# EAGLE board saklar sentuh biru (EAGLE 9.6.2)
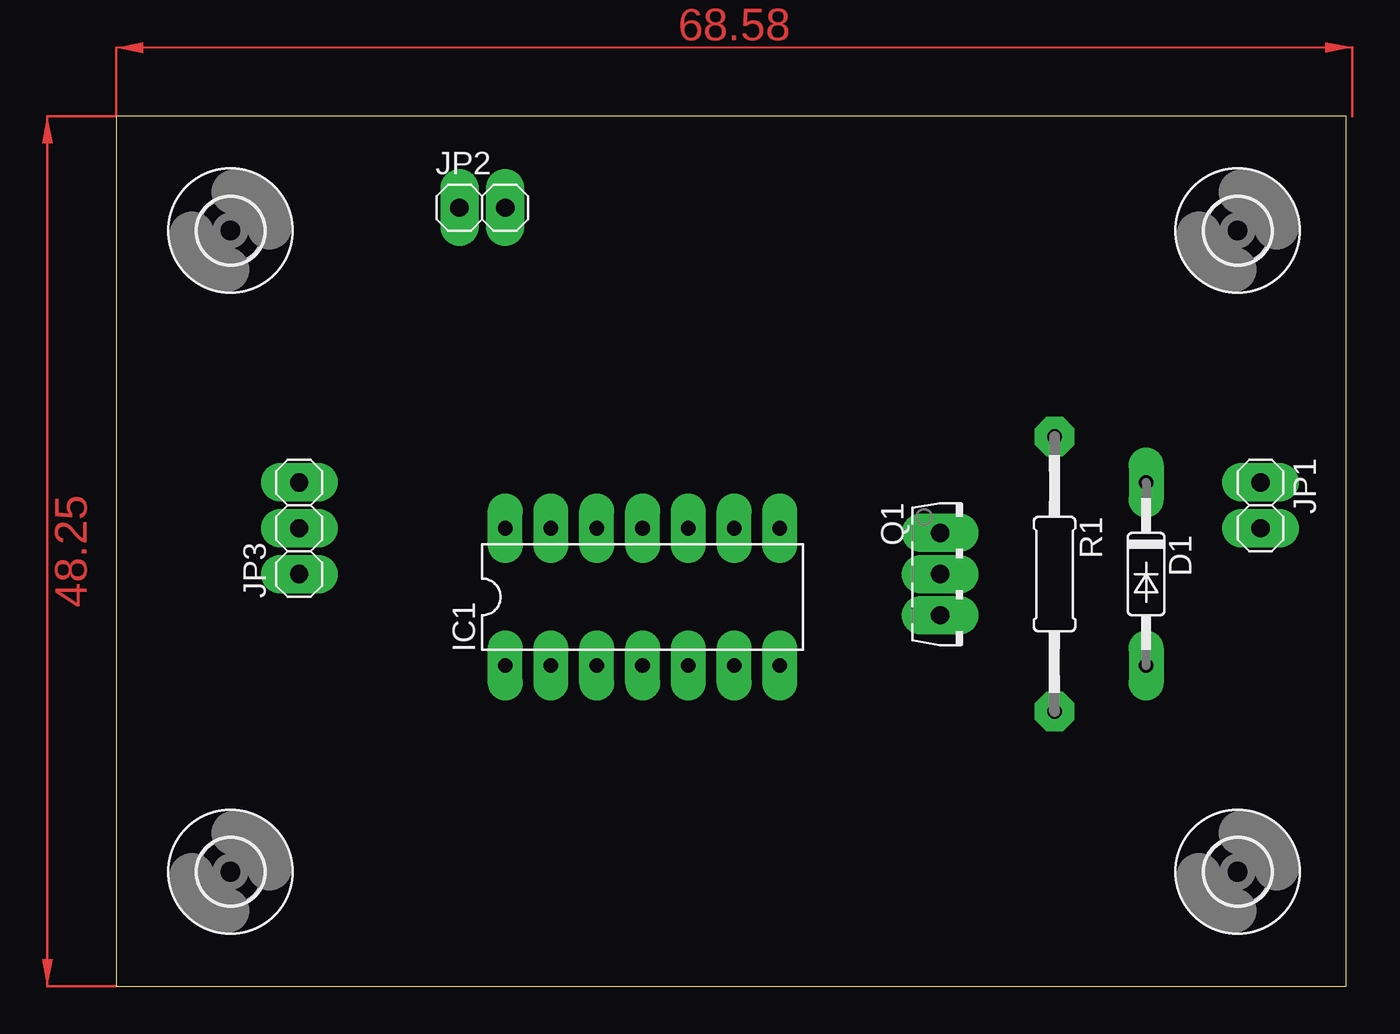
[diagram p0: board, top side]
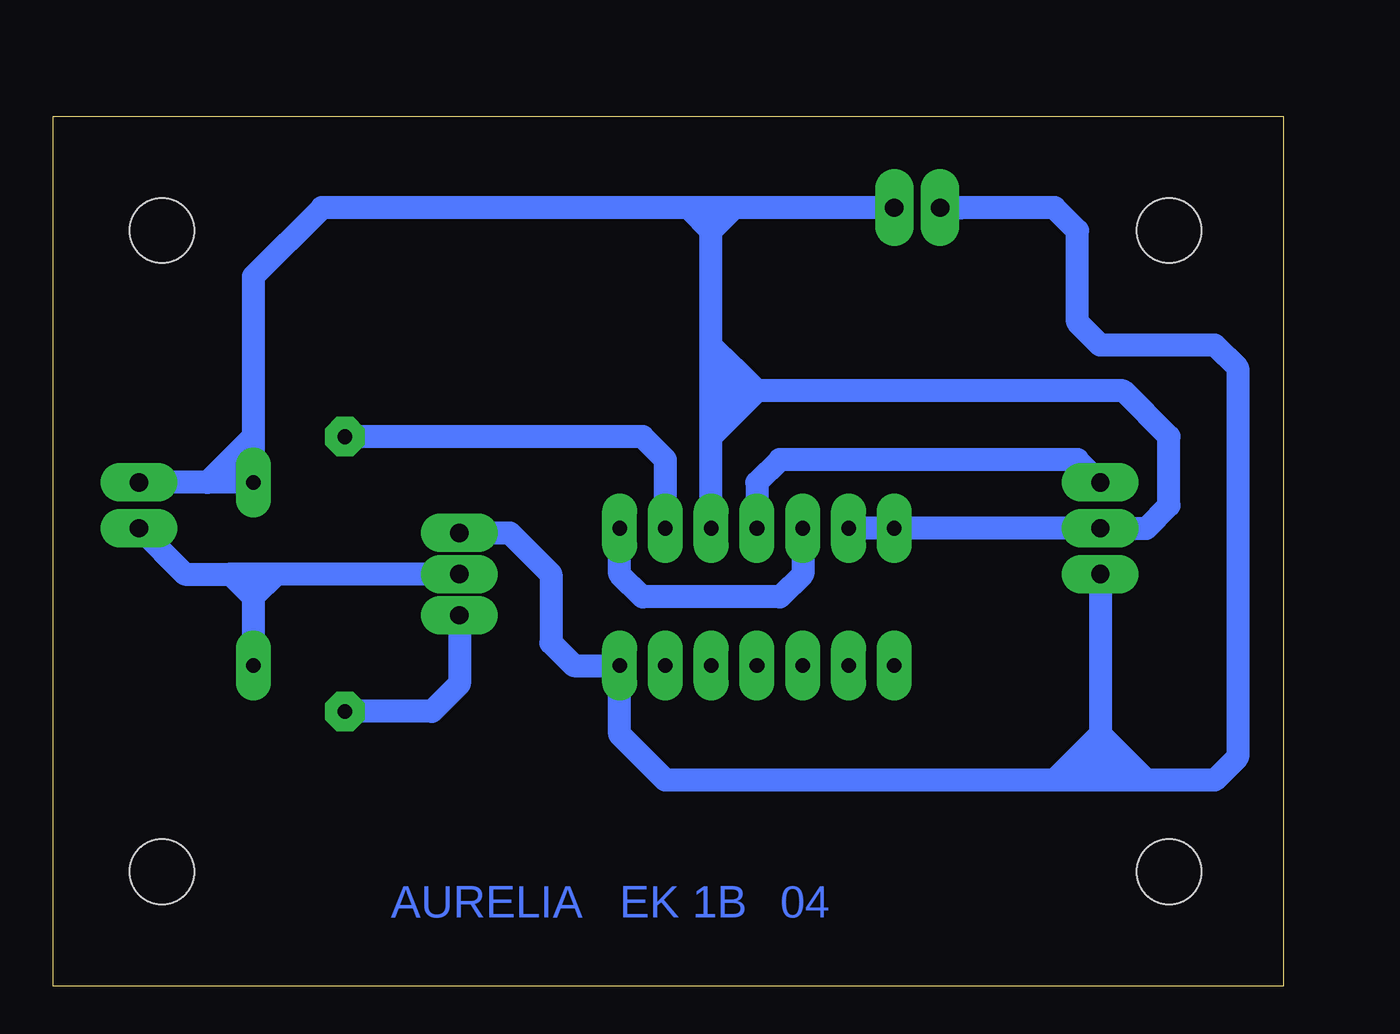
[diagram p1: board, bottom side, seen from below]

Size 68.25 x 48.25 mm. Coordinates in mm from the lower left corner, seen from the top.
Outline: 0,0 68.25,0 68.25,48.25 0,48.25 0,0
Copper layers (1*16): Top 0.035mm / dielectric 1.5mm / Bottom 0.035mm
Design rules "default *": minimum track width 6mil, minimum drill 0.35mm, track to track 6mil, track to pad 6mil, pad to pad 6mil, via to via 6mil, smd to smd 6mil, copper to edge 40mil, drill to drill 6mil, minimum pad ring 22mil, minimum via ring 8mil, stop-mask expansion 4mil, vias tented up to drill 0mil, thermal gap 10mil

## Footprints (pad centres in the part's own frame; a part is rotated, then mirrored left to right if it is on the bottom)
DO35-10 = drill 0.813 long: A 5.08,0; C -5.08,0
3,6 = hole 3.6: 0,0
DIL14 = drill 0.813 pad 1.778 long: 1 -7.62,-3.81; 2 -5.08,-3.81; 3 -2.54,-3.81; 4 0,-3.81; 5 2.54,-3.81; 6 5.08,-3.81; 7 7.62,-3.81; 8 7.62,3.81; 9 5.08,3.81; 10 2.54,3.81; 11 0,3.81; 12 -2.54,3.81; 13 -5.08,3.81; 14 -7.62,3.81
1X02 = drill 1.016 pad 1.93 long: 1 -1.27,0; 2 1.27,0
1X03 = drill 1.016 pad 1.93 long: 1 -2.54,0; 2 0,0; 3 2.54,0
TO126AV = drill 1.016 long: B 2.286,-1.27; C 0,-1.27; E -2.286,-1.27
0207/15 = drill 0.813 pad 2.184 octagon: 1 -7.62,0; 2 7.62,0

## Placement (x,y rotation side)
D1  1N4148DO35-10  [DO35-10]  57.15,22.86 270 top
H1  MOUNT-HOLE3.6  [3,6]  62.23,6.35 0 top
H2  MOUNT-HOLE3.6  [3,6]  6.35,6.35 0 top
H3  MOUNT-HOLE3.6  [3,6]  62.23,41.91 0 top
H4  MOUNT-HOLE3.6  [3,6]  6.35,41.91 0 top
IC1  74AC74N  [DIL14]  29.21,21.59 0 top
JP1  [1X02]  63.5,26.67 270 top
JP2  [1X02]  20.32,43.18 0 top
JP3  [1X03]  10.16,25.4 90 top
Q1  BD139  [TO126AV]  46.99,22.86 270 top
R1  [0207/15]  52.07,22.86 270 top

## Library data of the parts
D1 = diode
H1-H4 = holes
IC1 = 74xx-eu EDIT
JP1-JP3 = pinhead 2
Q1 = transistor-power 2
R1 = rcl; SPICEPREFIX: R

## Nets
GND: IC1.7 JP2.1 JP3.1 Q1.E
N$1: IC1.9 R1.1
N$2: Q1.B R1.2
N$3: D1.A JP1.2 Q1.C
N$4: IC1.11 JP3.3
N$5: IC1.8 IC1.12
VCC: D1.C IC1.10 IC1.13 IC1.14 JP1.1 JP2.2 JP3.2

## Tracks (layer width: path | path; a pad name or v marks a point on that pad's centre or on a via)
GND
  Bottom 1.27: 17.78,43.18 JP2.1 12.7,43.18 11.43,41.91 11.43,36.83 10.16,35.56 3.81,35.56 2.54,34.29 2.54,12.7 3.81,11.43 7.62,11.43 | 10.16,11.43 12.7,11.43 | 12.7,11.43 34.29,11.43 36.83,13.97 IC1.7 39.37,17.78 40.64,19.05 40.64,22.86 42.93,25.15 Q1.E | 7.62,11.43 10.16,11.43 | JP3.1 10.16,13.97 | 10.16,13.97 10.16,12.7 | 10.16,12.7 10.16,11.43 | 10.16,12.7 8.89,12.7 | 8.89,12.7 7.62,11.43 | 8.89,12.7 10.16,13.97 | 10.16,13.97 11.43,12.7 | 11.43,12.7 12.7,11.43 | 10.16,12.7 11.43,12.7
N$1
  Bottom 1.27: IC1.9 34.29,29.21 35.56,30.48 R1.1
N$2
  Bottom 1.27: Q1.B 45.72,16.76 47.24,15.24 R1.2
N$3
  Bottom 1.27: Q1.C 55.88,22.86 | 55.88,22.86 57.15,22.86 | 57.15,22.86 58.42,22.86 | 58.42,22.86 60.96,22.86 JP1.2 | 57.15,22.86 57.15,21.59 | 57.15,21.59 D1.A | 58.42,22.86 57.15,21.59 | 55.88,22.86 57.15,21.59
N$4
  Bottom 1.27: JP3.3 11.43,29.21 27.94,29.21 29.21,27.94 IC1.11
N$5
  Bottom 1.27: IC1.12 26.67,22.86 27.94,21.59 35.56,21.59 36.83,22.86 IC1.8
VCC
  Bottom 1.27: 30.48,43.18 JP2.2 21.59,41.91 | 30.48,43.18 31.75,43.18 | 31.75,43.18 33.02,43.18 | IC1.10 31.75,30.48 | 31.75,30.48 31.75,31.75 | 31.75,31.75 31.75,33.02 | 31.75,33.02 31.75,34.29 | 31.75,34.29 31.75,35.56 | 31.75,35.56 31.75,41.91 | 31.75,41.91 31.75,43.18 | 29.21,33.02 8.89,33.02 6.35,30.48 6.35,26.67 7.62,25.4 JP3.2 IC1.14 IC1.13 | 29.21,33.02 30.48,33.02 | 30.48,33.02 31.75,33.02 | 29.21,33.02 30.48,34.29 | 30.48,34.29 31.75,35.56 | 30.48,34.29 31.75,34.29 | 29.21,33.02 31.75,30.48 | 30.48,33.02 31.75,31.75 | 30.48,43.18 31.75,41.91 | 33.02,43.18 31.75,41.91 | 57.15,30.48 57.15,39.37 53.34,43.18 33.02,43.18 | 57.15,30.48 D1.C 59.69,27.94 | 59.69,27.94 JP1.1 | 57.15,30.48 59.69,27.94
(copper drawn outside any net)
  shapes: Top area x2

## Text on the board
Bottom: 04 | EK 1B | AURELIA